# Altium PCB Main.PcbDoc (part 2 of 2)
Units mm, origin at the board's own origin, x right, y up, seen from the top; angles counter-clockwise.
Board outline 150 x 140 mm, 2 copper layers (Top Layer, Bottom Layer); 87 components, 111 nets, 391 pads, 43 vias.
Unrouted connection lines stored in the file: 32.
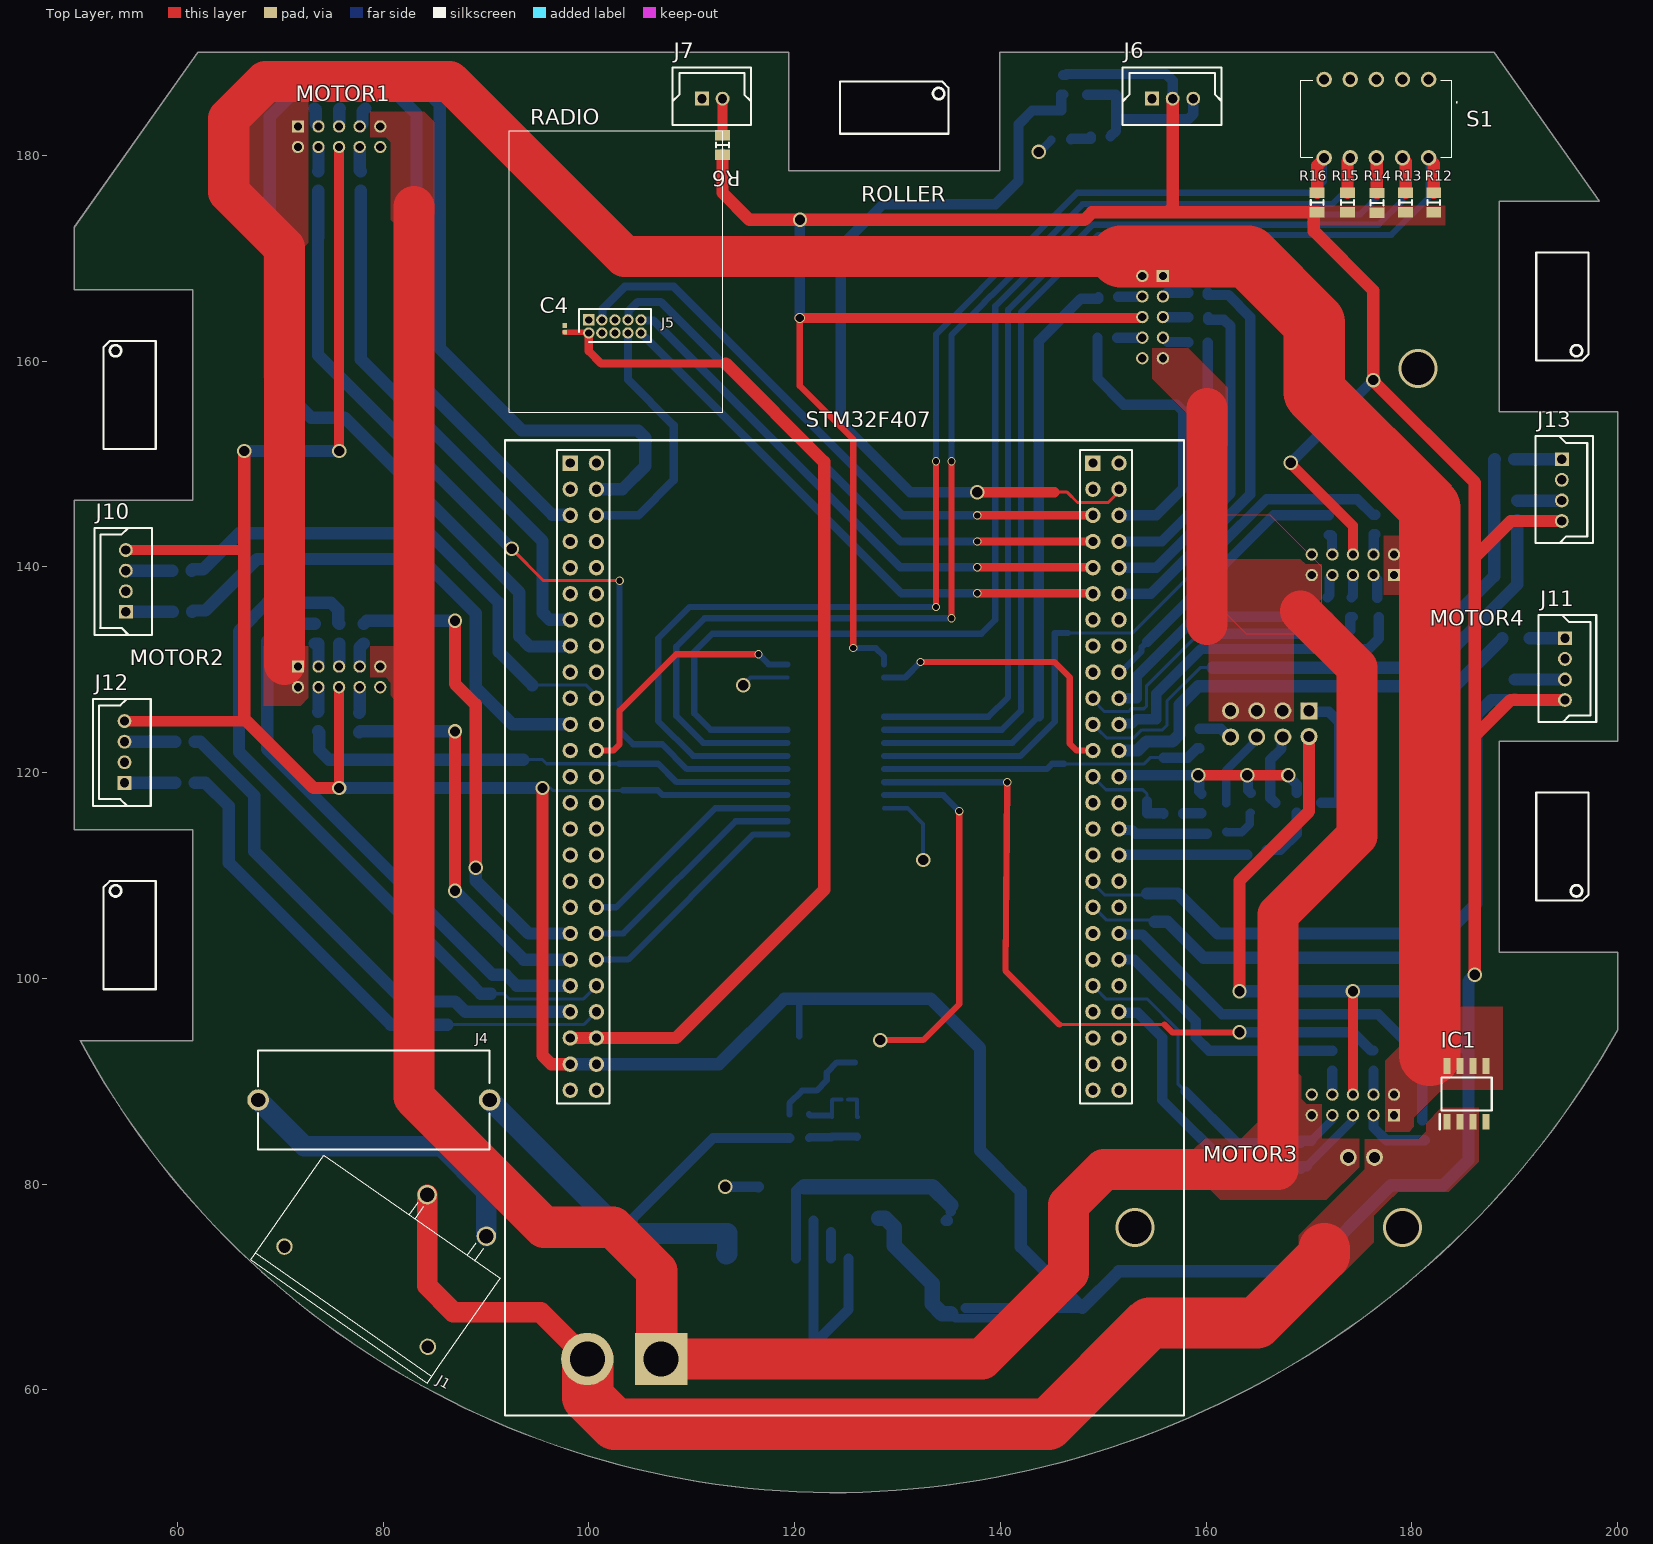
[diagram p0: Top Layer view]

## Polygon pours and split planes (outlines as drawn) (continued)
P_VCC on Top Layer "Top Layer-P_VCC 3" (solid, pour order 38): 179.75,143 177.25,143 177.25,137.3 177.58,137.3 179.75,137.3
GND on Top Layer "Top Layer-GND 5" (solid, pour order 34): 174.875,84.4 174.875,81.65 171.7,78.475 161.4,78.475 158.8,81.075 158.8,83.3 158.775,83.325 159.85,84.4
P_VCC on Top Layer "Top Layer-P_VCC" (solid, pour order 30): 177.4,85.075 179.725,85.075 180.2,85.55 180.2,86.425 182.925,89.15 188.85,89.15 188.85,97.25 182.675,97.25 177.4,91.975
KickVCC on Top Layer "Top Layer-KickVCC" (solid, pour order 28): 178.15,79.275 183.6,79.275 186.5,82.175 186.5,87.4 182.875,87.4 181.4,85.925 181.4,85.15 180.625,84.375 178.15,84.375
no net on Top Layer "Top Layer-No Net 1" (solid, pour order 26): 177,80.5
KickVCC on Top Layer "Top Layer-KickVCC 1" (solid, pour order 24): 176.3,76.9 176.3,74.35 173.15,71.2 169,71.2 169,75.025 175.4,81.425 175.4,84.375 179.925,84.375 179.925,80.525
no net on Top Layer "Top Layer-No Net" (solid, pour order 2): 175.325,84.275
Bateria on Bottom Layer "Bottom Layer-Bateria" (solid, pour order 56): 125,95.5 124.995,92.6 129.4,92.6 129.4,95.5
5V on Bottom Layer "Bottom Layer-5V 1" (solid, pour order 32): 137.05,66.525 147.375,66.525 148.6,67.75 137.05,67.75
5V on Bottom Layer "Bottom Layer-5V" (solid, pour order 22): 126.925,77.75 126.925,75.45 127.5,74.875 129.275,74.875 129.275,77.75
NetJ2_4 on Bottom Layer "Bottom Layer-NetJ2_4" (solid, pour order 20): 123.05,77.75 126.275,77.75 126.275,75.425 125.875,75.025 124.995,75.025 124.424,74.65 123.05,74.65
12V on Bottom Layer "Bottom Layer-12V" (solid, pour order 18): 110.025,71.025 107.2,73.85 103.275,73.85 100.787,76.337 102.125,77.675 106.975,77.675 110.025,74.625
GND on Bottom Layer "Bottom Layer-GND" (solid, pour order 16): 104.2,67.65 101.1,67.65 101.075,67.675 101.075,72.05 100.925,72.2 106.8,72.2 109.4,69.6
GND on Bottom Layer "Bottom Layer-GND 1" (solid, pour order 10): 104.2,58.925 128.325,58.925 128.325,70.125 106.675,70.125 104.2,67.65
12V on Bottom Layer "Bottom Layer-12V 1" (solid, pour order 12): 110.025,74.625 119.1,74.625 119.1,71.025 110.025,71.025

## Text inside footprints (layer, text, board x,y; h text height)
J5: Top Overlay "RADIO" at 94.29,182.98 h1.52